# Altium PCB Board_routed.PcbDoc (part 4 of 4)
Units mm, origin at the board's own origin, x right, y up, seen from the top; angles counter-clockwise.
Board outline 115.4 x 92.5 mm, 2 copper layers (Top Layer, Bottom Layer); 95 components, 82 nets, 440 pads, 192 vias.
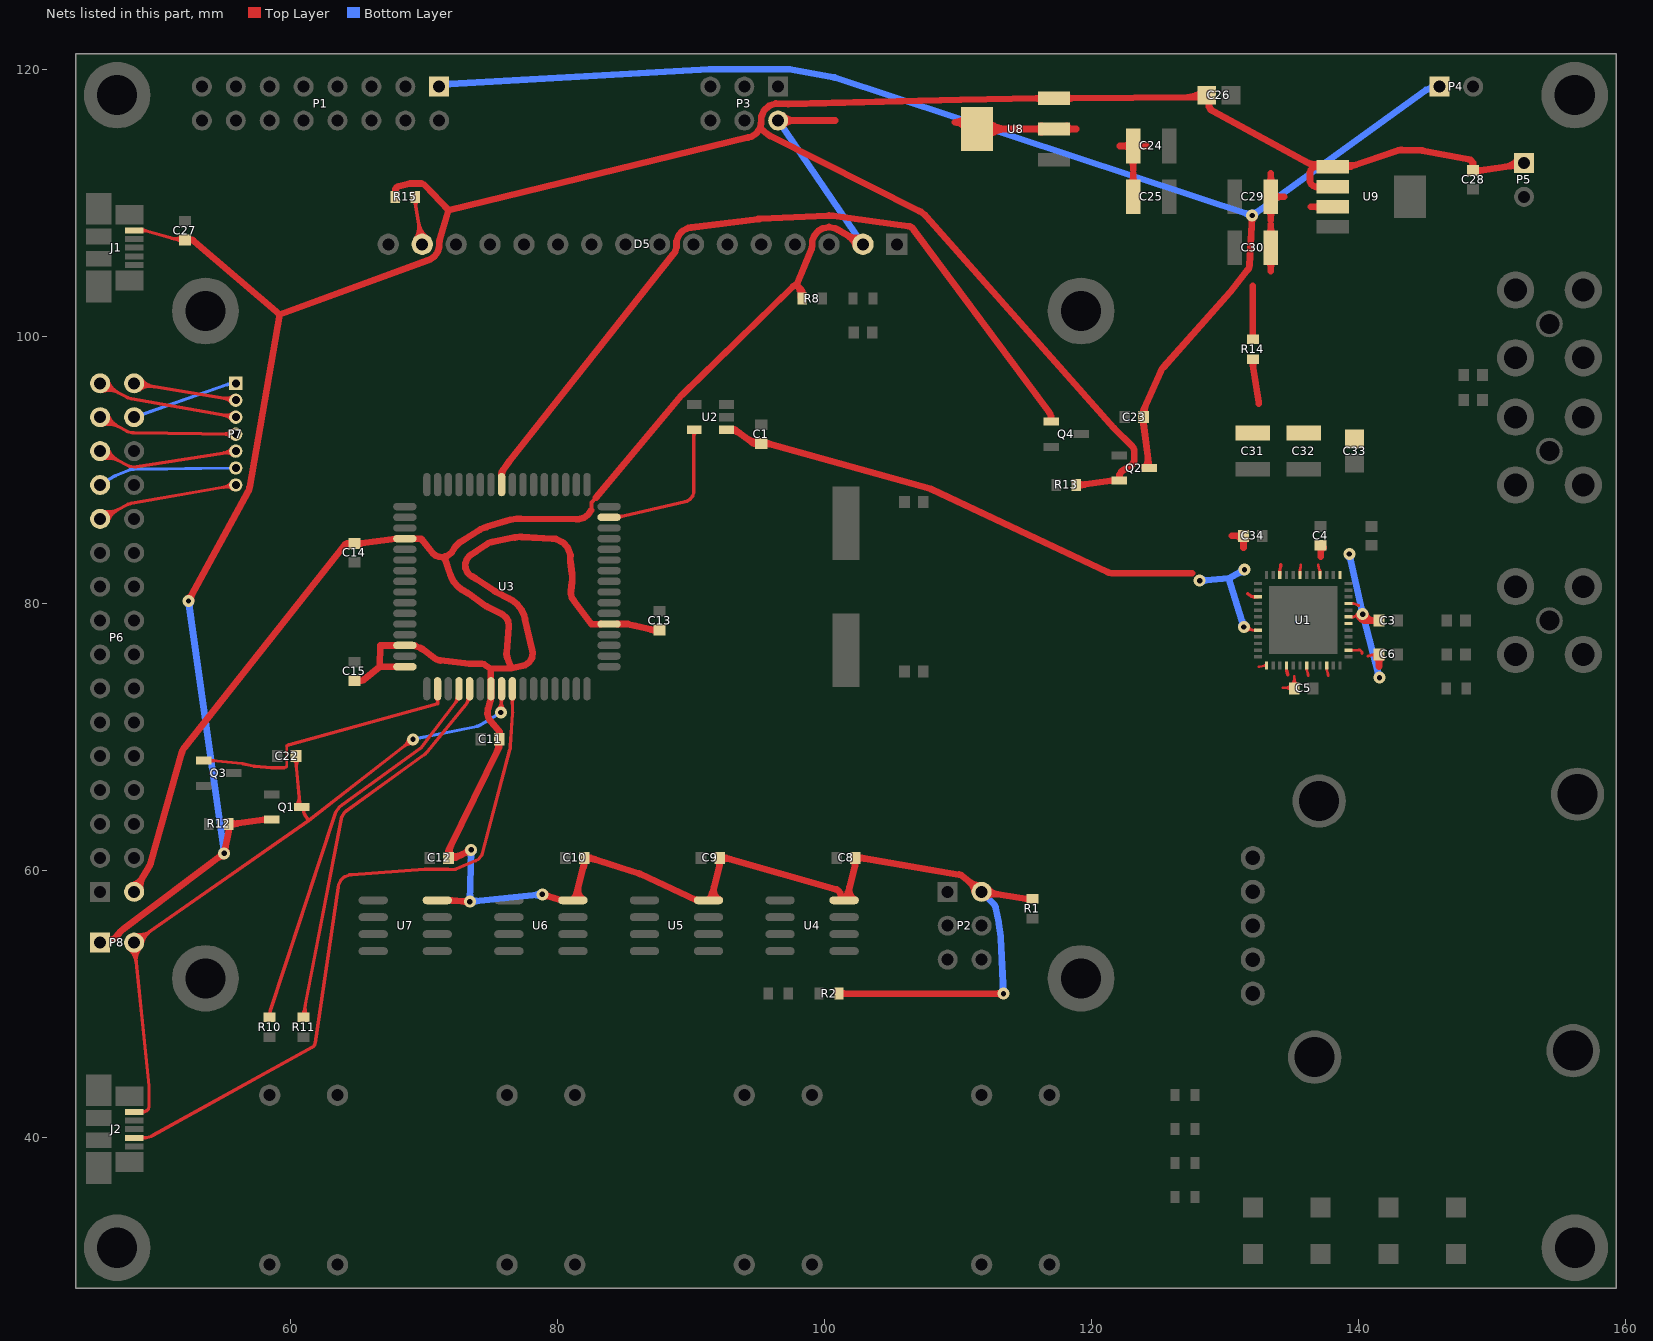
[diagram p4: the nets of this part, all layers, seen from the top]

## Via types
v1: diameter 0.9, hole 0.4, Top Layer to Bottom Layer, 183 vias
v2: diameter 0.8, hole 0.4, Top Layer to Bottom Layer, tented top, 9 vias

## Nets (pads, with @x,y where several pads share a name; then routed paths per layer and width w, separated by ;. In a path a pad name is that pad's centre, name@x,y a point inside that pad or via, vN(x,y) a via of type N, cw(c..) or ccw(c..) an arc to the next point about the centre after c; other vN are vias at no path point) (continued)
TEST_CLK: U2.5 U3.31 | length 12.8
  Top Layer w0.254: U3.31@83.85,86.48 84.323,86.48 84.45,86.48 84.466,86.48 84.497,86.484 84.512,86.487 89.527,87.645 89.672,87.679 89.924,87.838 90.109,88.07 90.207,88.352 90.207,88.5 90.207,92.705 90.207,92.832 U2.5@90.24,93.03 ; U3.31@84.528,86.606 ccw(c84.73,86.929) 84.816,86.557 ; U3.31@84.576,86.402 cw(c84.858,86.225) 84.783,86.55 ; U2.5@90.1,92.89 cw(c89.842,92.632) 90.207,92.632 ; 90.207,92.472 cw(c90.798,92.472) U2.5@90.38,92.89
TFT_CLK: P6.30 P7.1 | length 9.1
  Bottom Layer w0.254: P6.30@48.26,93.98 55.239,96.423 55.273,96.435 55.344,96.447 ; P7.1@55.513,96.588 cw(c55.344,96.619) 55.344,96.447 ; P7.1@55.521,96.622 cw(c55.281,96.69) 55.322,96.443 cw(c55.36,96.219) P7.1@55.557,96.333 ; P7.1@55.562,96.325 ccw(c55.344,96.191) 55.344,96.447 ; P7.1@55.88,96.52 55.507,96.447 55.38,96.447 55.344,96.447
TFT_EN: P6.23 P7.7 | length 15.7
  Top Layer w0.254: P6.23@45.72,86.36 47.715,87.403 47.795,87.445 47.966,87.503 48.055,87.519 P7.7@55.88,88.9 ; P6.23@45.83,86.712 ccw(c46.097,87.562) 46.509,86.773 ccw(c46.922,85.983) P6.23@46.072,86.25 ; P6.23@45.906,86.955 ccw(c46.356,88.39) 47.053,87.057 ccw(c47.75,85.724) P6.23@46.315,86.174 ; P7.7@55.574,89.114 cw(c54.837,89.63) 54.993,88.743 cw(c55.15,87.857) P7.7@55.666,88.594
TFT_FLASH: P6.29 P7.4 | length 15.6
  Top Layer w0.254: P6.29@45.72,93.98 47.715,92.937 47.837,92.873 48.107,92.805 48.246,92.803 P7.4@55.88,92.71 ; P6.29@45.83,93.628 cw(c46.097,92.778) 46.509,93.567 cw(c46.922,94.357) P6.29@46.072,94.09 ; P6.29@45.906,93.385 cw(c46.356,91.95) 47.053,93.283 cw(c47.75,94.616) P6.29@46.315,94.166 ; P7.4@55.613,92.449 ccw(c54.969,91.821) 54.98,92.721 ccw(c54.991,93.621) P7.4@55.619,92.977
TFT_INT: P6.25 P7.6 | length 10.4
  Bottom Layer w0.254: P6.25@45.72,88.9 46.78,89.557 46.802,89.571 46.848,89.594 46.873,89.604 47.815,89.989 47.916,90.031 48.134,90.075 48.246,90.077 P7.6@55.88,90.17
TFT_LE: P6.27 P7.5 | length 15.7
  Top Layer w0.254: P6.27@45.72,91.44 47.715,90.397 47.882,90.31 48.256,90.248 48.442,90.277 P7.5@55.88,91.44 ; P6.27@45.83,91.088 cw(c46.097,90.238) 46.509,91.027 cw(c46.922,91.817) P6.27@46.072,91.55 ; P6.27@45.906,90.845 cw(c46.356,89.41) 47.053,90.743 cw(c47.75,92.076) P6.27@46.315,91.626 ; P7.5@55.579,91.66 cw(c54.851,92.191) 54.99,91.301 cw(c55.129,90.411) P7.5@55.66,91.139
TFT_MDS: P6.32 P7.2 | length 12.9
  Top Layer w0.254: P6.32@48.26,96.52 P7.2@55.88,95.25 ; P6.32@48.474,96.22 cw(c48.992,95.495) 49.139,96.374 cw(c49.285,97.252) P6.32@48.56,96.734 ; P6.32@48.622,96.013 cw(c49.496,94.789) 49.744,96.273 cw(c49.991,97.756) P6.32@48.767,96.882 ; P7.2@55.576,95.033 ccw(c54.844,94.51) 54.992,95.398 ccw(c55.14,96.286) P7.2@55.663,95.554
TFT_SD: P6.31 P7.3 | length 15.7
  Top Layer w0.254: P6.31@45.72,96.52 47.715,95.477 47.795,95.435 47.966,95.377 48.055,95.361 P7.3@55.88,93.98 ; P6.31@45.83,96.168 cw(c46.097,95.318) 46.509,96.107 cw(c46.922,96.897) P6.31@46.072,96.63 ; P6.31@45.906,95.925 cw(c46.356,94.49) 47.053,95.823 cw(c47.75,97.156) P6.31@46.315,96.706 ; P7.3@55.574,93.766 ccw(c54.837,93.25) 54.993,94.137 ccw(c55.15,95.023) P7.3@55.666,94.286
UID: J2.4 U3.9 | length 52.6
  Top Layer w0.254: J2.4@48.26,39.99 48.823,39.99 48.95,39.99 49.143,39.99 49.518,40.087 49.689,40.181 61.617,46.787 61.704,46.835 61.818,46.999 61.833,47.098 63.545,58.759 63.572,58.946 63.748,59.281 64.024,59.538 64.372,59.689 64.561,59.703 70.034,60.1 70.088,60.104 70.194,60.106 70.247,60.104 70.406,60.099 70.425,60.099 70.704,60.102 70.775,60.102 70.811,60.101 70.82,60.101 70.839,60.102 70.848,60.102 70.982,60.111 71.057,60.116 71.21,60.116 71.284,60.109 71.387,60.101 71.396,60.1 71.413,60.1 71.422,60.1 71.77,60.101 71.819,60.101 72.212,60.093 72.256,60.093 72.344,60.11 72.384,60.127 73.862,60.761 74.048,60.841 74.312,61.146 74.364,61.342 76.416,69.086 76.432,69.144 76.451,69.262 76.454,69.321 76.615,71.803 76.616,71.82 76.617,71.855 76.617,71.873 76.6,73.026 76.6,73.03 76.6,73.157 U3.9@76.6,73.63 ; J2.4@48.794,39.921 cw(c48.962,39.753) 48.962,39.99 ; J2.4@48.794,40.059 ccw(c48.961,40.226) 48.961,39.99 ; U3.9@76.497,72.924 cw(c76.248,72.668) 76.605,72.673 cw(c76.963,72.678) U3.9@76.706,72.927
USB_BUSVCC: C22.1 J2.1 P8.2 Q1.3 U3.8 | length 67.5
  Top Layer w0.254: P8.2@47.867,54.126 cw(c46.919,52.959) 48.415,53.114 cw(c49.911,53.269) P8.2@48.744,54.217 ; P8.2@48.027,54.324 cw(c47.466,53.632) 48.352,53.724 cw(c49.238,53.816) P8.2@48.546,54.377 ; J2.1@48.26,41.94 48.823,41.94 48.95,41.94 49.034,41.94 49.19,42.004 49.31,42.123 49.375,42.279 49.375,42.363 49.377,42.79 49.377,42.792 49.377,43.84 49.377,43.851 49.376,43.873 49.375,43.884 P8.2@48.26,54.61 61.342,63.771 ; P8.2@48.324,54.973 ccw(c48.479,55.851) 48.99,55.121 ccw(c49.501,54.391) P8.2@48.623,54.546 ; P8.2@48.368,55.224 ccw(c48.629,56.705) 49.492,55.473 ccw(c50.355,54.241) P8.2@48.874,54.502 ; J2.1@48.792,42.012 ccw(c48.977,42.209) 49.08,41.959 ; J2.1@48.794,41.871 cw(c48.962,41.703) 48.962,41.94 cw(c48.962,42.177) J2.1@48.794,42.009 ; C22.1@60.215,68.32 cw(c59.876,67.913) 60.404,67.962 ; C22.1@60.285,68.278 cw(c60.22,68.121) 60.39,68.121 ; C22.1@60.39,68.58 60.39,68.257 60.39,68.13 60.39,68.121 ; Q1.3@60.407,64.881 ccw(c59.683,65.484) 60.622,65.569 ; 60.42,67.779 cw(c61.206,67.85) C22.1@60.6,68.355 ; C22.1@60.495,68.278 ccw(c60.56,68.121) 60.39,68.121 ; 60.963,64.385 cw(c61.187,64.385) Q1.3@61.132,64.602 ; Q1.3@61.263,64.77 61.09,64.77 Q1.3@60.815,64.77 ; v1@68.833,69.887 cw(c68.059,69.984) 68.538,69.369 cw(c69.017,68.753) v1@69.113,69.527 ; v1(69.153,69.847) 61.342,63.771 ; v1@75.524,72.1 ccw(c75.002,72.68) 75.781,72.639 ccw(c76.56,72.598) v1@75.98,72.076 ; U3.8@75.69,72.931 cw(c75.421,72.689) 75.783,72.67 ; v1(75.74,71.86) 75.798,72.974 75.8,73.03 75.8,73.157 U3.8@75.8,73.63 ; 75.783,72.677 cw(c76.135,72.658) U3.8@75.899,72.92 ; 60.39,68.121 60.391,68.103 60.392,68.094 60.667,65.07 60.667,64.943 Q1.3@60.815,64.77 ; Q1.3@60.815,64.77 60.963,64.597 60.963,64.47 60.963,64.407 60.999,64.286 61.034,64.234 61.342,63.771
  Bottom Layer w0.254: v1(69.153,69.847) 73.938,70.811 73.991,70.822 74.092,70.861 74.139,70.89 v1(75.74,71.86)
USB_DM: R10.2 U3.4 | length 30.5
  Top Layer w0.254: R10.2@58.327,49.213 ccw(c58.244,49.394) 58.443,49.394 ; R10.2@58.42,49.01 58.443,49.233 58.443,49.36 58.443,49.394 ; R10.2@58.548,49.193 cw(c58.688,49.394) 58.443,49.394 ; 72.347,72.604 ccw(c71.91,72.935) U3.4@72.453,73.01 ; U3.4@72.6,73.63 72.6,73.157 72.6,73.03 72.6,72.985 72.571,72.9 72.544,72.864 69.852,69.317 69.813,69.266 69.72,69.175 69.668,69.137 63.833,64.911 63.643,64.773 63.368,64.397 63.295,64.174 58.464,49.494 58.454,49.461 58.443,49.394
USB_DP: R11.2 U3.5 | length 31
  Top Layer w0.254: R11.2@60.873,49.215 ccw(c60.804,49.381) 60.983,49.381 ; R11.2@60.96,49.01 60.983,49.233 60.983,49.36 60.983,49.381 ; R11.2@61.082,49.196 cw(c61.204,49.381) 60.983,49.381 ; 61.084,49.923 ccw(c62.115,49.723) R11.2@61.245,49.135 ; 73.224,72.631 ccw(c72.811,72.851) U3.5@73.258,72.987 ; 73.297,72.768 cw(c73.515,72.652) U3.5@73.443,72.888 ; U3.5@73.4,73.63 73.4,73.157 73.4,73.03 73.4,72.996 73.384,72.93 73.368,72.901 73.191,72.569 73.168,72.526 73.116,72.448 73.086,72.411 70.263,68.944 70.204,68.871 70.068,68.743 69.993,68.688 64.158,64.462 64.015,64.358 63.825,64.062 63.792,63.888 60.991,49.441 60.987,49.421 60.983,49.381
UVCON: Q3.1 U3.2 | length 22.3
  Top Layer w0.2: 59.687,69.341 59.69,69.033 59.69,69.03 59.69,67.781
  Top Layer w0.254: Q3.1@53.485,68.26 53.933,68.26 54.06,68.26 54.068,68.26 ; Q3.1@53.87,68.126 cw(c54.201,67.722) 54.253,68.242 ; Q3.1@53.894,68.37 ccw(c54.135,68.568) 54.104,68.257 ; Q3.1@53.907,68.351 ccw(c54.07,68.451) 54.068,68.26 ; Q3.1@53.908,68.171 cw(c54.065,68.077) 54.068,68.26 ; 59.673,67.781 59.542,67.731 59.505,67.717 59.429,67.703 59.39,67.703 58.59,67.703 58.58,67.703 58.56,67.704 58.55,67.705 57.297,67.824 57.267,67.827 57.208,67.837 57.179,67.844 56.408,68.026 56.394,68.029 56.366,68.034 56.352,68.035 54.09,68.258 54.082,68.259 54.068,68.26 ; 59.687,69.341 59.752,69.384 59.78,69.403 59.843,69.433 59.876,69.442 70.999,72.514 71,73.157 71,73.305 U3.2@71,73.63 ; U3.2@70.895,72.926 cw(c70.643,72.674) 70.999,72.673 ; 70.999,72.672 cw(c71.357,72.672) U3.2@71.104,72.925
VCC: C8.2 C9.2 C10.2 C11.2 C12.2 C13.1 C14.2 C15.2 C24.2 C25.2 C29.2 C30.2 D5.2 P2.2 P3.2 P6.2 R1.2 R2.1 R8.2 R14.2 U3.7 U3.21 U3.52 U3.62 U3.64 U4.8 U5.8 U6.8 U7.8 U8.2 U8.4 U9.3 | length 342
  Top Layer w0.3: 82.518,87.018 82.518,87.598 82.865,87.945
  Top Layer w0.5: P6.2@48.137,58.905 ccw(c47.841,60.075) 48.878,59.457 ccw(c49.915,58.839) P6.2@48.745,58.543 ; P6.2@48.26,58.42 49.377,60.295 49.42,60.367 49.487,60.523 49.511,60.606 51.848,68.861 51.877,68.966 51.977,69.16 52.044,69.245 64.006,84.368 64.063,84.44 64.228,84.52 65.233,84.52 65.26,84.522 65.273,84.524 67.88,84.875 67.897,84.878 67.933,84.88 U3.52@68.55,84.88 ; 64.216,84.514 cw(c64.354,84.228) C14.2@64.603,84.426 ; C15.2@64.77,74.23 65.288,74.23 65.418,74.276 65.471,74.319 66.664,75.282 ; C14.2@64.911,84.639 ccw(c65.249,85.082) 65.323,84.53 ; U3.64@68.55,75.28 68.2,75.28 66.914,75.282 66.664,75.282 ; U3.52@69.15,84.88 69.787,84.875 70.581,83.867 70.66,83.766 70.868,83.613 71.107,83.522 71.364,83.498 71.49,83.52 ; U7.8@70.98,57.785 71.809,57.785 71.864,57.782 71.893,57.778 71.899,57.778 72.051,57.764 v1(73.42,57.68) ; C12.2@71.866,61.153 ccw(c72.268,62.393) 72.861,61.232 ; C12.2@71.962,61.059 cw(c73.002,61.417) 72.014,61.899 ; v1@73.27,57.548 ccw(c72.908,57.228) 72.938,57.71 ccw(c72.968,58.192) v1@73.288,57.83 ; v1@73.326,61.629 cw(c72.866,61.777) 73.086,61.347 cw(c73.306,60.917) v1@73.455,61.377 ; v1(73.516,61.567) 72.425,61.009 72.377,60.985 72.274,60.96 C12.2@71.82,60.96 71.82,61.456 71.84,61.544 71.86,61.586 75.59,69.224 75.61,69.266 75.63,69.354 75.63,70.371 75.581,70.505 75.535,70.559 74.979,71.212 74.898,71.307 74.788,71.532 74.736,71.777 74.747,72.028 74.783,72.147 74.955,72.721 74.977,72.797 75,72.951 75,73.03 U3.7@75,73.63 75,73.595 74.996,73.595 74.986,75.129 ; 75.436,68.911 ccw(c74.448,69.394) C11.2@75.488,69.751 ; C11.2@75.532,70.014 ccw(c75.3,70.285) 75.572,70.515 ; v1(78.849,58.227) 80.252,57.798 80.273,57.792 80.318,57.785 U6.8@81.14,57.785 81.39,57.835 81.39,58.119 ; v1@78.942,58.05 cw(c79.169,57.624) 79.31,58.086 cw(c79.451,58.548) v1@79.025,58.321 ; U6.8@81.135,57.835 ccw(c81.104,58.119) 81.39,58.119 ; 81.546,58.763 ccw(c82.342,58.559) U6.8@81.963,57.829 ; C10.2@81.851,60.834 cw(c81.211,60.455) 81.932,60.27 ; C10.2@82.049,60.777 cw(c82.513,59.873) 82.823,60.84 ; 82.518,87.018 82.288,86.689 81.966,86.451 81.585,86.327 81.385,86.329 77.215,86.364 76.954,86.366 76.433,86.291 76.182,86.215 74.672,85.757 74.507,85.707 74.19,85.563 74.043,85.47 72.866,84.729 72.642,84.588 72.275,84.208 72.141,83.979 72.047,83.816 71.75,83.59 71.569,83.541 71.49,83.52 ; 82.865,87.945 82.873,87.953 82.888,87.97 82.896,87.979 89.268,95.608 89.277,95.618 89.296,95.639 89.306,95.649 97.576,103.714 97.631,103.767 97.766,103.84 97.841,103.857 97.9,103.87 ; U3.21@83.25,78.48 82.526,78.477 81.18,80.289 81.071,80.436 80.976,80.788 80.996,80.968 81.07,81.629 81.088,81.784 81.086,82.093 81.067,82.245 80.956,83.141 80.949,83.197 80.944,83.313 80.946,83.371 80.957,83.654 80.764,84.183 80.383,84.603 79.875,84.847 79.593,84.865 77.316,85.006 77.18,85.014 76.908,84.996 76.773,84.969 75.151,84.645 75.012,84.617 74.75,84.507 74.635,84.428 73.97,83.972 73.93,83.946 73.508,83.665 73.373,83.575 73.177,83.313 73.081,83 73.096,82.673 73.22,82.37 73.44,82.127 73.584,82.05 73.591,82.046 73.677,82 73.851,81.895 73.936,81.838 75.182,81.004 75.215,80.982 75.285,80.941 75.32,80.922 76.404,80.355 76.618,80.243 76.99,79.931 77.284,79.55 77.491,79.111 77.545,78.874 78.091,76.488 78.133,76.305 78.07,75.935 77.87,75.618 77.565,75.401 77.383,75.359 76.529,75.163 ; U3.21@84.45,78.48 85.27,78.482 85.767,78.351 85.8,78.343 87.091,78.05 87.113,78.045 87.158,78.04 C13.1@87.63,78.04 ; 86.973,78.077 ccw(c87.128,78.758) C13.1@87.5,78.167 ; U5.8@91.295,57.835 ccw(c91.264,58.119) 91.55,58.119 ; 91.706,58.763 ccw(c92.502,58.559) U5.8@92.123,57.829 ; C9.2@92.011,60.834 cw(c91.371,60.455) 92.092,60.27 ; C9.2@92.213,60.779 cw(c92.679,59.939) 92.943,60.863 ; P3.2@96.52,116.205 100.796,116.205 ; P3.2@96.874,115.851 cw(c97.727,114.998) 97.727,116.205 cw(c97.727,117.412) P3.2@96.874,116.559 ; 97.896,103.874 cw(c97.14,103.106) R8.2@98.211,102.982 ; R8.2@98.243,103.045 ccw(c98.05,103.261) 98.317,103.373 ; R8.2@98.31,102.87 98.31,103.391 98.256,103.52 98.206,103.57 97.9,103.87 ; R2.1@101.08,50.8 101.43,50.8 v1(113.405,50.789) ; U4.8@101.455,57.835 ccw(c101.424,58.119) 101.71,58.119 ; U4.8@101.473,57.833 cw(c101.564,58.175) 101.21,58.175 ; 101.866,58.763 ccw(c102.662,58.559) U4.8@102.283,57.829 ; C8.2@102.171,60.834 cw(c101.531,60.455) 102.252,60.27 ; D5.2@102.339,106.792 ccw(c101.056,106.448) 101.72,107.598 ccw(c102.384,108.748) D5.2@102.728,107.465 ; C8.2@102.387,60.788 cw(c102.839,60.15) 102.97,60.92 ; D5.2@102.87,106.934 100.965,108.034 100.771,108.146 100.33,108.224 99.889,108.146 99.501,107.922 99.213,107.579 99.06,107.158 99.06,106.809 99.012,106.565 98.964,106.45 97.9,103.87 ; 109.74,116.076 110.45,116.076 U8.4@111.4,115.57 112.35,115.566 115.54,115.566 ; U8.4@110.558,115.581 ccw(c109.74,115.154) 109.74,116.076 ccw(c109.74,117.114) U8.4@110.607,116.543 ; P2.2@111.263,58.369 ccw(c110.062,58.247) 110.824,59.183 ccw(c111.587,60.118) P2.2@111.709,58.917 ; P2.2@112.055,58.016 cw(c112.767,57.041) 112.953,58.234 cw(c113.139,59.427) P2.2@112.164,58.715 ; U8.4@112.072,114.898 cw(c113.683,113.287) 113.683,115.566 ; U8.4@112.072,116.242 ccw(c113.704,117.874) 113.704,115.566 ; v1@113.264,50.648 ccw(c112.922,50.307) 112.923,50.79 ccw(c112.923,51.273) v1@113.264,50.931 ; 115.084,57.901 ccw(c115.152,58.336) R1.2@115.411,57.981 ; 115.54,115.57 U8.2@116,115.57 ; R1.2@115.57,57.9 115.107,57.9 115.079,57.902 115.066,57.904 P2.2@111.76,58.42 110.318,59.596 110.262,59.641 110.133,59.7 110.062,59.712 102.776,60.954 102.757,60.957 102.719,60.96 C8.2@102.3,60.96 102.3,60.485 102.294,60.435 102.287,60.411 101.727,58.221 101.719,58.188 101.71,58.119 ; U8.2@116.25,115.32 U8.2@116,115.57 ; U8.2@116.25,115.82 U8.2@116,115.57 ; U8.2@116.323,115.393 ccw(c115.896,114.966) 115.896,115.57 ccw(c115.896,116.174) U8.2@116.323,115.747 ; U8.2@116.477,115.547 U8.2@116.5,115.57 ; U8.2@116.477,115.593 U8.2@116.5,115.57 ; U8.2@117.923,115.593 117.9,115.57 U8.2@117.2,115.57 ; U8.2@118.077,115.393 cw(c118.504,114.966) 118.504,115.57 cw(c118.504,116.174) U8.2@118.077,115.747 ; U8.2@118.15,115.82 118.4,115.57 ; 118.86,115.57 118.4,115.57 ; 122.1,114.3 C24.2@123.11,114.3 ; C25.2@122.898,111.452 ccw(c122.386,111.964) 123.11,111.964 ccw(c123.834,111.964) C25.2@123.322,111.452 ; C24.2@122.898,113.338 cw(c122.386,112.826) 123.11,112.826 cw(c123.834,112.826) C24.2@123.322,113.338 ; C24.2@122.898,114.088 ccw(c122.386,113.576) 122.386,114.3 ccw(c122.386,115.024) C24.2@122.898,114.512 ; C25.2@123.11,110.49 123.11,112.25 ; 123.11,112.54 C24.2@123.11,114.3 ; C24.2@123.322,114.088 cw(c123.834,113.576) 123.834,114.3 cw(c123.834,115.024) C24.2@123.322,114.512 ; 124.12,114.3 C24.2@123.11,114.3 ; R14.2@132.08,99.81 132.08,103.829 ; C30.2@133.218,105.718 cw(c132.706,105.206) 133.43,105.206 cw(c134.154,105.206) C30.2@133.642,105.718 ; C30.2@133.218,107.642 ccw(c132.706,108.154) 133.43,108.154 ccw(c134.154,108.154) C30.2@133.642,107.642 ; C29.2@133.218,109.528 cw(c132.706,109.016) 133.43,109.016 cw(c134.154,109.016) C29.2@133.642,109.528 ; C29.2@133.218,111.452 ccw(c132.706,111.964) 133.43,111.964 ccw(c134.154,111.964) C29.2@133.642,111.452 ; 133.43,104.92 133.43,108.44 ; 133.43,108.73 C29.2@133.43,110.49 ; 133.43,112.25 C29.2@133.43,110.49 ; C29.2@133.642,110.278 cw(c134.154,109.766) 134.154,110.49 cw(c134.154,111.214) C29.2@133.642,110.702 ; 134.44,110.49 C29.2@133.43,110.49 ; 136.41,109.74 U9.3@138.07,109.74 ; U9.3@137.193,109.563 ccw(c136.766,109.136) 136.766,109.74 ccw(c136.766,110.344) U9.3@137.193,109.917 ; 66.664,75.282 66.664,75.287 66.695,76.877 68.341,76.877 68.341,76.88 U3.62@68.55,76.88 69.202,76.88 69.306,76.859 69.354,76.839 69.704,76.691 69.724,76.682 69.764,76.662 69.783,76.651 69.85,76.614 69.873,76.602 69.917,76.574 69.938,76.558 70.728,75.955 70.835,75.873 71.088,75.771 71.222,75.756 73.372,75.511 73.404,75.508 73.47,75.505 73.503,75.505 74.058,75.516 74.075,75.516 74.202,75.516 74.301,75.515 74.49,75.457 74.572,75.403 74.986,75.129 ; 71.49,83.52 71.973,82.154 72.04,81.963 72.243,81.612 72.504,81.308 72.819,81.054 72.997,80.958 73.004,80.954 73.092,80.907 73.261,80.801 73.344,80.741 74.37,79.992 74.464,79.923 74.66,79.804 74.765,79.752 75.798,79.235 75.926,79.17 76.133,78.974 76.274,78.724 76.336,78.446 76.325,78.303 76.175,76.355 76.166,76.244 76.198,76.024 76.238,75.92 76.529,75.163 ; 74.986,75.129 76.529,75.163 ; 81.39,58.119 81.399,58.188 81.407,58.221 81.967,60.411 81.974,60.435 81.98,60.485 C10.2@81.98,60.96 82.415,60.96 82.484,60.949 82.518,60.938 86.086,59.792 86.115,59.783 86.172,59.761 86.201,59.747 90.374,57.813 90.403,57.799 90.468,57.785 90.5,57.785 U5.8@91.3,57.785 91.55,57.835 91.55,58.119 ; 91.55,58.119 91.559,58.188 91.567,58.221 92.127,60.411 92.134,60.435 92.14,60.485 C9.2@92.14,60.96 92.54,60.96 92.571,60.96 92.633,60.951 92.664,60.943 100.811,58.614 100.897,58.589 101.045,58.488 101.153,58.345 101.21,58.175 ; 101.21,58.175 101.21,58.085 101.21,57.835 U4.8@101.46,57.785 101.71,57.835 101.71,58.119 ; U8.2@116,115.57 U8.2@117.2,115.57 ; U8.2@116.5,115.57 U8.2@117.2,115.57 ; U8.2@117.2,115.57 118.4,115.57 ; U6.8@81.109,57.824 ccw(c80.602,58.477) 81.422,58.374 cw(c80.602,58.477) U6.8@81.109,57.824 ; U6.8@81.115,57.828 ccw(c80.792,58.374) 81.406,58.216 cw(c80.792,58.374) U6.8@81.115,57.828 ; U5.8@91.269,57.824 ccw(c90.762,58.477) 91.582,58.374 cw(c90.762,58.477) U5.8@91.269,57.824 ; U5.8@91.275,57.828 ccw(c90.952,58.374) 91.566,58.216 cw(c90.952,58.374) U5.8@91.275,57.828 ; 98.201,103.574 cw(c97.919,103.286) 98.232,103.033 ccw(c97.919,103.286) 98.202,103.573 ; 101.228,58.122 ccw(c101.708,58.283) 101.482,57.83 cw(c101.708,58.283) 101.228,58.122 ; U4.8@101.429,57.824 ccw(c100.922,58.477) 101.742,58.374 cw(c100.922,58.477) U4.8@101.429,57.824 ; U4.8@101.435,57.828 ccw(c101.112,58.374) 101.726,58.216 cw(c101.112,58.374) U4.8@101.435,57.828
  Bottom Layer w0.5: v1@73.282,57.825 ccw(c72.949,58.175) 73.432,58.163 ccw(c73.915,58.151) v1@73.565,57.818 ; v1@73.371,61.429 cw(c73.021,61.096) 73.504,61.084 cw(c73.987,61.072) v1@73.654,61.422 ; v1(73.516,61.567) v1(73.42,57.68) v1(78.849,58.227) ; v1@73.547,57.835 ccw(c73.852,58.209) 73.9,57.728 ccw(c73.949,57.248) v1@73.575,57.553 ; v1@78.694,58.353 cw(c78.32,58.659) 78.368,58.178 cw(c78.416,57.698) v1@78.722,58.072 ; P3.2@96.52,116.205 D5.2@102.87,106.934 ; P2.2@111.76,58.42 112.619,57.56 112.697,57.482 112.802,57.287 112.824,57.179 113.034,56.138 113.048,56.059 113.189,55.043 113.191,55.027 113.194,54.994 113.195,54.977 v1(113.405,50.789) ; v1@113.257,50.924 ccw(c112.899,51.248) 113.381,51.272 ccw(c113.863,51.296) v1@113.54,50.938
VCC_CT: C23.1 P1.1 P4.1 Q2.3 | length 108.1
  Top Layer w0.5: 123.9,93.428 cw(c124.45,93.502) C23.1@124.009,93.839 ; Q2.3@124,90.2 ccw(c123.111,90.88) 124.22,91.028 ; C23.1@124.03,94.084 cw(c124.999,94.455) 124.052,94.877 ; Q2.3@124.315,90.17 124.29,90.22 124.29,90.47 124.29,90.488 124.288,90.525 124.285,90.543 123.894,93.477 123.892,93.49 123.89,93.517 123.89,93.53 123.89,93.78 C23.1@123.89,93.98 123.89,94.18 123.89,94.43 123.89,94.472 123.908,94.555 123.925,94.593 125.192,97.433 125.225,97.507 125.313,97.643 125.367,97.703 130.379,103.33 130.411,103.368 131.714,105.042 131.766,105.108 131.825,105.266 131.829,105.351 v1(132.03,109.09) ; v1@131.881,108.956 cw(c131.522,108.634) 132.004,108.608 cw(c132.486,108.582) v1@132.164,108.941
  Bottom Layer w0.5: P1.1@71.12,118.745 71.62,118.945 71.87,118.945 71.901,118.946 91.367,120.043 91.44,120.045 97.27,120.045 97.294,120.045 97.342,120.041 97.365,120.037 100.645,119.458 100.672,119.453 100.724,119.44 100.75,119.432 v1(132.03,109.09) 144.978,118.441 145.048,118.492 145.213,118.545 ; P1.1@71.463,119.109 ccw(c71.874,119.544) 71.892,118.946 ; v1@131.851,109 ccw(c131.42,108.783) 131.572,109.242 ccw(c131.723,109.7) v1@131.94,109.269 ; v1@132.062,109.287 ccw(c132.139,109.764) 132.421,109.373 ccw(c132.704,108.981) v1@132.227,109.058 ; P4.1@145.324,118.545 cw(c145.324,118.018) P4.1@145.697,118.391 ; P4.1@145.558,118.834 cw(c145.213,118.896) 145.213,118.545 ; P4.1@145.563,118.858 cw(c145.181,118.947) 145.302,118.574 cw(c145.394,118.29) P4.1@145.639,118.46 ; P4.1@146.05,118.745 145.55,118.545 145.3,118.545 145.213,118.545
VCC_LED: D5.15 R15.1 | length 9
  Top Layer w0.254: R15.1@69.201,110.208 cw(c69.014,109.945) 69.332,109.999 ; R15.1@69.228,110.191 cw(c69.143,110.025) 69.33,110.025 ; D5.15@69.301,107.324 ccw(c67.977,108.265) 69.579,108.536 ccw(c71.181,108.807) D5.15@70.24,107.483 ; R15.1@69.33,110.49 69.33,110.167 69.33,110.04 69.33,110.025 ; 69.383,109.698 cw(c70.126,109.824) R15.1@69.512,110.261 ; R15.1@69.432,110.191 ccw(c69.517,110.025) 69.33,110.025 ; D5.15@69.508,107.177 ccw(c68.684,107.763) 69.681,107.931 ccw(c70.679,108.1) D5.15@70.093,107.276 ; D5.15@69.85,106.934 69.335,109.982 69.333,109.996 69.33,110.025
VCCLMK: C1.2 C3.2 C4.2 C5.2 C6.2 C31.2 C32.2 C33.2 C34.1 R14.1 U1.3 U1.8 U1.13 U1.16 U1.19 U1.22 U1.26 U1.30 U1.31 U1.33 U1.37 U1.40 U1.43 U1.46 U2.1 | length 95.9
  Top Layer w0.2: v1@131.544,78.327 ccw(c131.972,78.54) 131.874,78.072 ; v1@131.706,78.083 131.742,78.088 131.814,78.085 131.849,78.077 132.083,78.028 132.102,78.024 132.14,78.02 132.16,78.02 132.26,78.02 U1.8@132.46,78.02 ; v1@131.753,78.33 ccw(c132.123,78.405) 132.045,78.036 ; 132.139,78.016 ccw(c132.175,78.189) U1.8@132.271,78.041 ; 132.531,75.282 132.541,75.282 132.561,75.284 132.571,75.286 132.985,75.37 133.085,75.37 U1.13@133.11,75.37 ; 134.336,73.71 134.79,73.71 134.89,73.71 C5.2@135.19,73.66 135.19,74.01 135.19,74.11 135.19,74.564 ; C5.2@134.978,73.498 ccw(c134.466,72.986) 134.466,73.71 ccw(c134.466,74.434) 134.978,73.922 ccw(c134.466,74.434) 135.19,74.434 ccw(c135.914,74.434) C5.2@135.402,73.922 ; 135.605,82.475 ccw(c135.757,82.448) U1.43@135.63,82.359 ; U1.43@135.61,82.17 135.61,82.37 135.61,82.47 135.61,82.487 135.613,82.519 135.616,82.535 135.662,82.796 135.664,82.807 135.667,82.829 135.667,82.84 135.671,82.892 135.672,82.903 135.673,82.909 135.673,82.919 135.673,82.924 ; U1.19@136.11,75.37 136.11,75.17 136.11,75.07 136.11,75.061 136.113,75.043 136.115,75.034 136.219,74.686 136.224,74.669 136.23,74.634 136.23,74.616 ; 136.116,75.03 cw(c136.309,75.088) U1.19@136.132,75.183 ; 136.985,82.924 136.985,82.92 136.985,82.912 136.986,82.907 136.993,82.827 136.996,82.788 137.016,82.711 137.032,82.675 137.099,82.52 137.105,82.508 137.11,82.483 137.11,82.47 137.11,82.37 U1.40@137.11,82.17 ; 137.083,82.559 cw(c136.838,82.451) U1.40@137.087,82.354 ; U1.22@137.61,75.37 137.61,75.17 137.61,75.07 137.61,75.061 137.613,75.043 137.615,75.034 137.719,74.686 137.724,74.669 137.73,74.634 137.73,74.616 ; 137.616,75.03 cw(c137.809,75.088) U1.22@137.632,75.183 ; U1.26@139.26,76.52 139.46,76.52 139.56,76.52 139.564,76.52 140.006,76.534 140.111,76.538 140.262,76.392 140.262,76.286 140.262,76.271 ; U1.31@139.26,79.02 139.46,79.02 139.56,79.02 139.591,79.02 139.652,79.03 139.681,79.04 139.935,79.127 139.954,79.133 139.994,79.14 v1@140.014,79.14 ; U1.33@139.26,80.02 139.46,80.02 139.56,80.02 139.595,80.02 139.664,80.007 139.696,79.995 140.014,79.871 ; U1.33@139.449,79.999 cw(c139.54,79.866) 139.57,80.025 ; U1.31@139.45,79.04 ccw(c139.552,79.175) 139.607,79.015 ; U1.31@139.453,79.037 ccw(c139.54,79.116) 139.578,79.005 ; v1@139.974,79.318 cw(c139.592,79.43) 139.721,79.054 cw(c139.827,78.741) v1@140.062,78.973 ; 140.686,76.079 140.7,76.079 140.727,76.083 140.741,76.087 141.14,76.2 141.24,76.2 C6.2@141.54,76.2 ; 140.986,76.156 cw(c141.051,75.928) C6.2@141.267,76.026 ; v1@131.601,77.967 cw(c131.898,77.511) 132.01,78.043 ccw(c131.898,77.511) v1@131.601,77.967
  Top Layer w0.25: 131.706,80.744 131.955,80.581 132.001,80.551 132.106,80.52 132.16,80.52 U1.3@132.285,80.52 ; 132.152,80.506 ccw(c132.202,80.674) U1.3@132.285,80.52 ; U1.3@132.46,80.52 U1.3@132.285,80.52 ; U1.46@134.11,82.17 134.11,82.345 134.11,82.47 134.11,82.487 134.113,82.519 134.116,82.535 134.162,82.796 134.164,82.807 134.167,82.829 134.167,82.84 134.171,82.892 134.172,82.903 134.173,82.909 134.173,82.919 134.173,82.924 ; U1.16@134.61,75.37 134.61,75.195 134.61,75.07 134.61,75.047 134.615,75.002 134.621,74.98 134.696,74.677
  Top Layer w0.5: U2.1@92.64,93.03 92.94,93.03 93.19,93.03 93.243,93.03 93.342,92.997 93.384,92.966 94.561,92.089 94.613,92.05 94.735,92.01 94.8,92.01 95.05,92.01 C1.2@95.25,92.01 95.45,92.01 95.7,92.01 95.727,92.01 95.781,92.003 95.808,91.995 107.928,88.61 107.95,88.604 107.993,88.588 108.014,88.578 121.187,82.38 121.287,82.333 121.502,82.285 121.612,82.285 127.536,82.285 ; U2.1@92.876,92.956 cw(c93.03,91.903) 93.665,92.756 ; 94.104,92.43 ccw(c94.969,93.591) C1.2@95.178,92.158 ; C1.2@95.374,91.879 cw(c95.756,91.2) 95.966,91.951 ; 130.526,85.09 130.98,85.09 ; C34.1@131.205,84.865 130.98,85.09 ; 131.38,84.186 131.38,84.616 131.38,84.629 131.38,84.637 131.38,84.64 ; C34.1@131.38,85.14 C34.1@131.38,85.09 ; C34.1@131.58,84.842 131.38,84.64 ; R14.1@132.08,98.31 132.08,98.21 132.08,97.96 132.08,97.943 132.083,97.909 132.085,97.892 132.515,95.084 132.519,95.058 132.523,95.005 132.523,94.979 ; 132.119,97.673 cw(c132.887,97.791) R14.1@132.261,98.251 ; 137.16,83.536 C4.2@137.16,83.99 ; C4.2@137.385,84.215 C4.2@137.16,83.99 ; C33.2@139.25,92.301 C33.2@139.7,92.34 C33.2@139.25,92.49 ; v1@140.016,79.161 ccw(c140.53,79.264) 140.53,78.74 ; v1@140.506,79.259 ccw(c141.14,79.387) 141.14,78.74 ; 140.686,78.74 C3.2@141.14,78.74 ; C6.2@141.34,75.95 C6.2@141.54,75.75 ; C6.2@141.517,76.127 141.54,76.15 C6.2@141.54,76.2 ; 141.54,75.296 C6.2@141.54,75.75 ; C3.2@141.54,78.74 141.39,78.74 C3.2@141.14,78.74 ; C6.2@141.74,75.95 C6.2@141.54,75.75 ; 130.98,85.09 C34.1@131.23,85.09 ; 130.98,85.09 C34.1@131.23,85.09 ; C34.1@131.23,85.09 C34.1@131.38,85.09 ; C34.1@131.23,85.09 C34.1@131.38,85.09 ; 131.38,84.64 C34.1@131.38,84.89 ; 131.38,84.64 C34.1@131.38,84.89 ; C34.1@131.38,84.89 C34.1@131.38,85.09 ; C34.1@131.38,84.89 C34.1@131.38,85.09 ; C4.2@137.16,83.99 C4.2@137.16,84.24 ; C4.2@137.16,83.99 C4.2@137.16,84.24 ; C4.2@137.16,84.24 C4.2@137.16,84.39 C4.2@137.16,84.24 ; C6.2@141.54,75.75 C6.2@141.54,76 ; C6.2@141.54,75.75 C6.2@141.54,76 ; C6.2@141.54,75.75 C6.2@141.54,76 ; C6.2@141.54,76 C6.2@141.54,76.2 ; C6.2@141.54,76 C6.2@141.54,76.2 ; C6.2@141.54,76 C6.2@141.54,76.2 ; U2.1@92.919,92.978 cw(c93.14,92.767) 93.322,93.012 ccw(c93.14,92.767) U2.1@92.919,92.978
  Bottom Layer w0.5: v1(128.094,81.736) 130.28,81.9 ; v1@128.224,81.888 ccw(c128.539,82.254) 128.575,81.773 ccw(c128.611,81.291) v1@128.245,81.606 ; v1@131.233,78.353 ccw(c130.806,78.578) 131.267,78.721 ccw(c131.728,78.864) v1@131.503,78.437 ; v1@131.268,82.614 cw(c130.803,82.746) 131.039,82.324 cw(c131.274,81.903) v1@131.406,82.368 ; v1(131.41,78.26) 130.28,81.9 ; v1(131.46,82.56) 130.28,81.9 ; v1@139.199,83.557 cw(c138.94,83.15) 139.411,83.255 cw(c139.883,83.359) v1@139.475,83.619 ; v1(139.307,83.726) v1(140.31,79.22) v1(141.57,74.47) ; v1@140.141,79.327 ccw(c139.734,79.586) 140.205,79.691 ccw(c140.676,79.796) v1@140.417,79.389 ; v1@140.21,79.047 cw(c139.967,78.629) 140.434,78.753 cw(c140.9,78.877) v1@140.483,79.12 ; v1@141.397,74.57 ccw(c140.979,74.813) 141.446,74.937 ccw(c141.913,75.061) v1@141.67,74.643
VCON_CT: Q4.1 U3.41 | length 60.3
  Top Layer w0.5: U3.41@75.8,88.93 75.8,89.28 75.8,89.53 75.8,89.696 75.899,90.01 75.993,90.145 76.39,90.714 76.436,90.776 88.625,106.145 88.758,106.313 88.9,106.719 88.9,106.934 88.9,107.166 89.064,107.6 89.37,107.948 89.78,108.165 90.011,108.194 95.012,108.823 95.048,108.828 95.121,108.834 95.158,108.836 100.226,109.081 100.326,109.086 100.525,109.078 100.625,109.064 106.285,108.279 106.395,108.264 106.586,108.15 106.652,108.061 116.852,94.287 116.905,94.216 116.96,94.048 116.96,93.96 116.96,93.71 Q4.1@116.985,93.66 ; U3.41@75.823,89.541 cw(c76.197,89.715) 75.858,89.951 ; U3.41@75.825,89.534 cw(c76.534,89.661) 75.943,90.073 ; Q4.1@116.94,93.683 ccw(c116.535,93.887) 116.966,94.029
VIN: C26.2 C27.1 C28.1 J1.1 P5.1 P8.1 Q1.2 Q2.2 R12.2 R13.2 R15.2 U8.3 U9.1 U9.2 | length 261
  Top Layer w0.254: J1.1@48.26,107.98 48.823,107.98 48.95,107.98 48.979,107.98 49.038,107.972 49.067,107.964 51.51,107.265 51.537,107.258 51.592,107.25 ; J1.1@48.773,107.894 cw(c49.017,107.454) 49.155,107.938 ; J1.1@48.794,107.911 cw(c48.962,107.743) 48.962,107.98 cw(c48.962,108.217) J1.1@48.794,108.049 ; 51.061,107.394 ccw(c51.36,108.439) C27.1@51.887,107.489 ; C27.1@51.772,107.135 ccw(c51.592,107.052) 51.592,107.25 ; C27.1@51.772,107.365 cw(c51.592,107.448) 51.592,107.25 ; C27.1@52.07,107.25 51.747,107.25 51.62,107.25 51.592,107.25
  Top Layer w0.5: P8.1@45.72,54.61 46.22,54.81 46.47,54.81 46.591,54.81 ; P8.1@46.074,54.964 ccw(c46.444,55.334) P8.1@46.444,54.81 ; P8.1@46.08,54.957 ccw(c46.452,55.315) 46.669,54.846 ; P8.1@46.189,54.438 cw(c46.732,54.238) 46.489,54.763 ; P8.1@46.208,54.502 cw(c46.591,54.418) 46.591,54.81 ; C27.1@52.07,107.25 52.27,107.25 52.52,107.25 52.592,107.25 52.726,107.2 52.78,107.154 59.18,101.68 ; C27.1@52.234,107.152 cw(c52.505,106.918) 52.738,107.19 ; v1@52.282,80.402 ccw(c52.145,80.865) 52.569,80.634 ccw(c52.993,80.403) v1@52.53,80.267 ; v1(52.338,80.21) 56.802,88.397 56.843,88.473 56.9,88.634 56.914,88.719 59.18,101.68 ; 54.622,61.012 cw(c54.912,60.626) v1@54.98,61.104 ; 54.622,61.012 ccw(c54.332,61.398) v1@54.81,61.33 ; v1@54.898,61.469 ccw(c54.632,61.872) 55.105,61.775 ccw(c55.578,61.678) v1@55.175,61.412 ; R12.2@55.277,63.345 cw(c54.854,63.066) 55.35,62.965 ; R12.2@55.42,63.68 ccw(c55.878,64.292) 55.987,63.535 ; Q1.2@58.565,63.82 58.24,63.82 57.99,63.82 57.98,63.82 57.958,63.819 57.947,63.817 55.774,63.505 55.758,63.502 55.726,63.5 55.71,63.5 55.46,63.5 R12.2@55.36,63.5 55.36,63.3 55.36,63.05 55.36,63.032 55.356,62.997 55.353,62.98 v1(55.008,61.302) 47.48,55.65 47.421,55.606 47.316,55.506 47.269,55.451 46.889,55.004 46.811,54.912 46.591,54.81 ; R15.2@67.83,110.49 67.83,110.69 67.83,110.94 67.83,111.06 67.977,111.249 68.093,111.279 68.842,111.472 68.876,111.481 68.945,111.49 68.98,111.49 69.68,111.49 69.792,111.49 69.999,111.402 70.077,111.32 71.82,109.5 ; R15.2@67.913,110.646 cw(c68.298,110.906) 67.931,111.19 ; 115.875,117.868 cw(c115.886,117.235) U8.3@116.326,117.69 ; 115.917,117.869 ccw(c115.907,118.443) U8.3@116.32,118.044 ; U8.3@116.301,117.719 ccw(c115.996,117.487) 115.991,117.87 ; U8.3@116.303,118.024 cw(c115.987,118.272) 115.991,117.87 ; U8.3@118.075,118.048 ccw(c118.509,118.491) 118.515,117.871 ; U8.3@118.078,117.695 cw(c118.498,117.284) 118.492,117.871 ; U8.3@118.099,117.719 cw(c118.405,117.486) 118.405,117.87 ; U8.3@118.099,118.021 ccw(c118.405,118.254) 118.405,117.87 ; R13.2@118.86,88.9 118.96,88.9 119.21,88.9 119.226,88.9 119.258,88.902 119.274,88.905 121.447,89.217 121.458,89.219 121.48,89.22 121.49,89.22 121.74,89.22 Q2.2@122.065,89.22 122.09,89.27 122.09,89.52 122.09,89.662 122.227,89.91 122.347,89.985 122.933,90.355 123.053,90.43 123.19,90.678 123.19,90.82 123.19,91.42 123.19,91.529 123.107,91.731 123.029,91.808 121.701,93.142 121.678,93.165 107.634,108.998 107.515,109.132 107.227,109.354 107.067,109.434 95.935,115.044 95.871,115.076 95.751,115.154 95.697,115.199 95.17,115.63 ; R13.2@118.92,89.08 ccw(c119.378,89.692) 119.487,88.935 ; C26.2@128.196,118.182 cw(c127.935,118.224) 127.935,117.96 ; C26.2@128.316,117.798 ccw(c127.935,117.431) 127.935,117.96 ; 128.79,117.387 cw(c129.363,117.386) C26.2@128.958,117.792 ; 128.859,117.143 cw(c129.303,117.407) C26.2@128.949,117.783 ; 136.059,113.113 ccw(c136.84,114.545) U9.1@137.3,112.98 ; 136.798,112.751 cw(c136.904,112.497) U9.1@137.148,112.624 ; U9.1@137.184,112.572 ccw(c136.807,112.232) 136.807,112.74 ; U9.1@137.184,112.908 cw(c136.807,113.248) 136.807,112.74 ; U9.2@137.192,111.064 ccw(c136.772,110.649) 136.771,111.24 ; U9.2@137.192,111.416 cw(c136.77,111.834) 136.771,111.24 ; U9.1@137.192,112.564 ccw(c136.771,112.146) 136.77,112.74 ; U9.1@137.193,112.916 cw(c136.77,113.336) 136.77,112.74 ; U9.2@138.07,111.24 137.12,111.24 136.87,111.24 136.771,111.24 ; U9.1@138.881,112.964 ccw(c139.43,114.078) 139.829,112.902 ; U9.1@138.96,112.578 cw(c139.311,112.279) 139.311,112.74 ; U9.1@138.96,112.902 ccw(c139.311,113.201) 139.311,112.74 ; C28.1@148.426,112.558 ccw(c148.04,112.889) 148.432,113.213 ; C28.1@148.73,112.58 ccw(c149.072,113.04) 149.155,112.473 ; 151.017,112.744 ccw(c150.801,114.222) P5.1@151.999,113.329 ; 151.291,112.784 ccw(c151.163,113.665) P5.1@151.955,113.258 ; P5.1@151.676,112.83 cw(c151.676,112.306) P5.1@152.046,112.676 ; P5.1@151.902,113.078 cw(c151.63,113.104) 151.63,112.83 ; P5.1@152.4,113.03 151.9,112.83 151.65,112.83 151.63,112.83 ; 59.18,101.68 70.286,105.741 70.469,105.808 70.779,106.046 71.003,106.366 71.12,106.739 71.12,106.934 71.12,107.024 71.146,107.205 71.172,107.292 71.82,109.5 ; 71.82,109.5 94.286,114.941 94.511,114.996 94.894,115.252 95.029,115.438 95.17,115.63 ; 95.17,115.63 95.232,115.991 95.241,116.043 95.25,116.151 95.25,116.205 95.25,116.466 95.457,116.947 95.835,117.306 96.326,117.487 96.587,117.473 96.815,117.461 96.824,117.461 97.25,117.445 97.284,117.445 110.186,117.77 110.191,117.77 115.991,117.87 ; 115.991,117.87 116,117.87 116.25,117.87 U8.3@117.2,117.87 118.15,117.87 118.4,117.87 118.405,117.87 ; 118.405,117.87 127.935,117.96 ; 127.935,117.96 127.94,117.96 128.19,117.96 C26.2@128.64,118.11 128.79,117.66 128.79,117.41 128.79,117.259 128.944,117 129.076,116.927 136.63,112.801 136.686,112.771 136.807,112.74 ; 136.77,112.74 U9.1@136.87,112.74 ; 136.77,112.74 136.586,112.664 136.446,112.523 136.37,112.339 136.37,112.24 136.37,111.74 136.37,111.64 136.446,111.456 136.587,111.316 136.771,111.24 ; 136.807,112.74 U9.1@136.87,112.74 ; U9.1@136.87,112.74 U9.1@137.12,112.74 ; U9.1@136.87,112.74 U9.1@137.12,112.74 ; U9.1@137.12,112.74 U9.1@138.07,112.74 ; U9.1@137.12,112.74 U9.1@138.07,112.74 ; U9.1@138.07,112.74 139.02,112.74 139.27,112.74 139.311,112.74 ; 139.311,112.74 139.391,112.753 139.431,112.767 142.897,113.942 142.978,113.969 143.146,113.996 143.232,113.995 144.621,113.975 144.666,113.975 144.752,113.966 144.795,113.958 148.224,113.302 148.384,113.272 148.59,113.022 148.59,112.86 148.59,112.61 C28.1@148.59,112.46 148.79,112.46 149.04,112.46 149.055,112.46 149.083,112.462 149.098,112.464 151.571,112.824 151.591,112.827 151.63,112.83 ; 127.209,117.953 ccw(c127.194,119.529) 128.319,118.425 cw(c127.194,119.529) 127.209,117.953 ; 127.901,117.96 cw(c127.907,117.363) 128.325,117.789 ccw(c127.907,117.363) 127.901,117.96 ; 151.418,112.802 cw(c151.551,111.892) 152.101,112.629 ccw(c151.551,111.892) 151.418,112.802 ; 151.426,112.804 cw(c151.554,111.905) 152.099,112.63 ccw(c151.554,111.905) 151.426,112.804 ; 151.55,112.824 cw(c151.603,112.106) 152.074,112.651 ccw(c151.603,112.106) 151.55,112.824
  Bottom Layer w0.5: v1@52.218,80.05 cw(c51.928,79.664) 52.406,79.732 cw(c52.884,79.8) v1@52.498,80.09 ; v1(52.338,80.21) v1(55.008,61.302) ; v1@54.848,61.422 ccw(c54.463,61.712) 54.941,61.78 ccw(c55.419,61.847) v1@55.128,61.462
pads on no net: J1.2 J1.3 J1.4 P1.3 P1.5 P6.3 P6.4 P6.5 P6.6 P6.7 P6.8 P6.9 P6.10 U1.2 U1.7 U1.9 U1.10 U1.12 U1.17 U1.18 U1.20 U1.21 U1.23 U1.24 U1.32 U1.38 U1.39 U1.41 U1.42 U1.44 U1.45 U1.47 U1.48 U3.1 U3.3 U3.35 U3.36 U3.37 U3.38 U3.43 U4.7 U5.7 U6.7 U7.7 U9.4

## Polygon pours and split planes (outlines as drawn)
GND on Bottom Layer "Bottom Layer-No Net" (solid, remove dead copper, pour order 2): 43.875,121.1 43.9,121.075 43.9,28.725 159.275,28.725 159.3,28.75 159.3,31.125 159.3,121.175
VCCLMK on Top Layer "Bottom Layer-No Net" (solid, remove dead copper, pour order 4): 127.65,95.7 127.65,71.375 143.1,71.375 144.625,72.9 144.625,89.05 144.625,94.325 143.25,95.7
VCC on Top Layer "Bottom Layer-No Net" (solid, remove dead copper, pour order 6): 100.4,118 100.475,117.925 100.475,114.35 102.45,112.375 107.1,107.725 126.075,107.725 126.975,107.725 132.4,102.3 137.975,102.3 138.8,102.3 140.1,103.6 141.475,104.975 141.475,117.925

## Other copper
Multi-Layer:
  lines w0: 0.794,0 0,0 ; 0.795,0 0,0 ; 0.806,0 0,0 ; 1.169,0 0,0 ; 1.182,0 0,0 ; 1.355,0 0,0 ; 1.401,0 0,0 ; 1.419,0 0,0 ; 1.548,0 0,0 ; 1.618,0 0,0 ; 1.62,0 0,0 ; 1.645,0 0,0 ; 1.67,0 0,0 ; 1.766,0 0,0 ; 1.808,0 0,0 ; 1.833,0 0,0 ; 1.892,0 0,0 ; 1.908,0 0,0 ; 1.909,0 0,0 ; 1.91,0 0,0 ; 1.913,0 0,0 ; 1.929,0 0,0 ; 1.93,0 0,0 ; 1.945,0 0,0 ; 1.954,0 0,0 ; 2,0 0,0 ; 2.012,0 0,0 ; 2.037,0 0,0 ; 2.097,0 0,0 ; 2.105,0 0,0 ; 2.121,0 0,0 ; 2.122,0 0,0 ; 2.138,0 0,0 ; 2.144,0 0,0 ; 2.152,0 0,0 ; 2.155,0 0,0 ; 2.194,0 0,0 ; 2.209,0 0,0 ; 2.211,0 0,0 ; 2.213,0 0,0 ; 2.215,0 0,0 ; 2.251,0 0,0 ; 2.286,0 0,0 ; 2.288,0 0,0 ; 2.293,0 0,0 ; 2.322,0 0,0 ; 2.323,0 0,0 ; 2.344,0 0,0 ; 2.345,0 0,0 ; 2.35,0 0,0 ; 2.393,0 0,0 ; 2.421,0 0,0 ; 2.428,0 0,0 ; 2.452,0 0,0 ; 2.464,0 0,0 ; 2.469,0 0,0 ; 2.471,0 0,0 ; 2.498,0 0,0 ; 2.53,0 0,0 ; 2.561,0 0,0 ; 2.583,0 0,0 ; 2.589,0 0,0 ; 2.593,0 0,0 ; 2.625,0 0,0 ; 2.629,0 0,0 ; 2.637,0 0,0 ; 2.657,0 0,0 ; 2.688,0 0,0 ; 2.725,0 0,0 ; 2.726,0 0,0 ; 2.754,0 0,0 ; 2.787,0 0,0 ; 2.798,0 0,0 ; 2.826,0 0,0 ; 2.877,0 0,0 ; 2.902,0 0,0 ; 2.936,0 0,0 ; 2.937,0 0,0 ; 2.948,0 0,0 ; 3,0 0,0 ; 3.001,0 0,0 ; 3.016,0 0,0 ; 0,0 2.452,0 0,0 ; 0,0 2.258,0 ; 0,0 2.387,0 0,0 ; 0,0 2.942,0 0,0 ; 0,0 2.935,0 ; 0,0 2.935,0 ; 0,0 2.851,0 0,0 ; 0,0 2.903,0 ; 0,0 2.935,0 ; 0,0 2.935,0 ; 0,0 2.71,0 0,0 ; 0,0 2.806,0 ; 0,0 2.806,0 ; 0,0 2.952,0 ; 0,0 2.903,0 ; 0,0 2.903,0 ; 0,0 2.935,0 ; 0,0 2.935,0 ; 0,0 1.465,0 0,0 ; 0,0 2.716,0 ; 0,0 1.774,0 0,0 ; 0,0 2.903,0 ; 0,0 1.921,0 0,0 ; 0,0 1.871,0 ; 0,0 1.484,0 0,0 ; 0,0 1.549,0 0,0 ; 0,0 1.832,0 0,0 ; 0,0 1.81,0 0,0 ; 0,0 2.806,0 ; 0,0 2.806,0 ; 0,0 2.806,0 ; 0,0 2.471,0 ; 0,0 2.471,0 ; 0,0 2.47,0 ; 0,0 2.47,0 ; 0,0 2.47,0 ; 0,0 2.47,0 ; 0,0 2.47,0 ; 0,0 2.725,0 ; 0,0 2.725,0 ; 0,0 2.726,0 ; 0,0 2.726,0 ; 0,0 2.158,0 ; 0,0 2.158,0 ; 0,0 2.158,0 ; 0,0 2.158,0 ; 0,0 2.158,0 ; 0,0 2.158,0 ; 0,0 2.158,0 ; 0,0 2.158,0 ; 0,0 1.769,0 ; 0,0 1.769,0 ; 0,0 1.769,0 ; 0,0 1.769,0 ; 0,0 1.769,0 ; 0,0 1.769,0 ; 0,0 1.769,0 ; 0,0 1.769,0 ; 0,0 1.769,0 ; 0,0 1.769,0 ; 0,0 1.769,0 ; 0,0 1.769,0 ; 0,0 1.769,0 ; 0,0 1.769,0 ; 0,0 1.769,0 ; 0,0 1.769,0 ; 0,0 1.769,0 ; 0,0 1.769,0 ; 0,0 1.769,0 ; 0,0 1.769,0 ; 0,0 1.769,0 ; 0,0 1.769,0 ; 0,0 1.769,0 ; 0,0 1.769,0 ; 0,0 2.357,0 ; 0,0 2.47,0 ; 0,0 2.952,0 ; 0,0 2.952,0 ; 0,0 1.097,0 ; 0,0 2.716,0 ; 0,0 1.319,0 0,0 ; 0,0 2.806,0 ; 0,0 2.952,0 ; 0,0 2.952,0 ; 0,0 2.952,0 ; 0,0 2.952,0 ; 0,0 2.952,0 ; 0,0 2.952,0 ; 0,0 2.952,0 ; 0,0 2.5,0 0,0 ; 0,0 2.258,0 ; 0,0 2.258,0 ; 0,0 2.065,0 0,0 ; 0,0 1.935,0 ; 0,0 2.716,0 ; 0,0 2.716,0 ; 0,0 2.716,0 ; 0,0 1.097,0 ; 0,0 1.097,0 ; 0,0 1.097,0 ; 0,0 1.657,0 0,0 ; 0,0 2.716,0 ; 0,0 2.716,0 ; 0,0 2.716,0 ; 0,0 2.716,0 ; 0,0 0.774,0 ; 0,0 0.774,0 ; 0,0 0.774,0 ; 0,0 1.097,0 ; 0,0 2.161,0 ; 0,0 2.357,0 ; 0,0 2.161,0 ; 0,0 2.161,0 ; 0,0 2.357,0 ; 0,0 2.357,0 ; 0,0 2.357,0 ; 0,0 2.357,0 ; 0,0 1.935,0 ; 0,0 1.935,0 ; 0,0 1.871,0 ; 0,0 1.871,0 ; 0,0 2.08,0 0,0

## Silkscreen, mask and mechanical layers (free items; w line width, h text height)
Top Overlay:
  text "Power only USB" at 45.3,112.2 h1.52
  text "LVDS_N" at 149.473,105.843 h1.52
  text "LVDS_P" at 146.2,85.575 h1.52
  text "CMOS" at 151.5,72.2 h1.52
  text "FLASH & TEST" at 86.36,46.99 h1.52
  text "DOWN" at 74.93,45.72 h1.52
  text "CANCEL/BACK" at 106.68,45.72 h1.52
  text "UP" at 59.69,44.45 h1.52
  text "OK" at 95.25,44.45 h1.52
  text "USB OTG" at 52.2,35.6 h1.52 r90
Mechanical 1:
  the board outline again, w0.254

## Text inside footprints (layer, text, board x,y; h text height)
P1: Top Overlay "1" at 73.66,119.253 h1.27 r180; Top Overlay "2" at 73.66,116.713 h1.27 r180
P2: Top Overlay "1" at 108.712,60.452 h1.27 r270; Top Overlay "2" at 111.252,60.96 h1.27 r270; Top Overlay "5" at 108.712,51.816 h1.27 r270; Top Overlay "6" at 111.252,51.816 h1.27 r270
P3: Top Overlay "1" at 98.552,119.253 h1.27 r180; Top Overlay "2" at 99.06,116.713 h1.27 r180; Top Overlay "5" at 89.916,119.253 h1.27 r180; Top Overlay "6" at 89.916,116.713 h1.27 r180
P6: Bottom Overlay "32" at 47.752,98.044 h1.27 r270; Bottom Overlay "31" at 45.212,98.044 h1.27 r270; Bottom Overlay "1" at 45.212,55.88 h1.27 r270; Bottom Overlay "2" at 47.752,55.88 h1.27 r270